# Altium PCB MainPCB.PcbDoc
Units mil, origin at the board's own origin, x right, y up, seen from the top; angles counter-clockwise.
Board outline 2325 x 1355 mil, 2 copper layers (Top Layer, Bottom Layer); 50 components, 30 nets, 230 pads, 0 vias.
Unrouted connection lines stored in the file: 125.
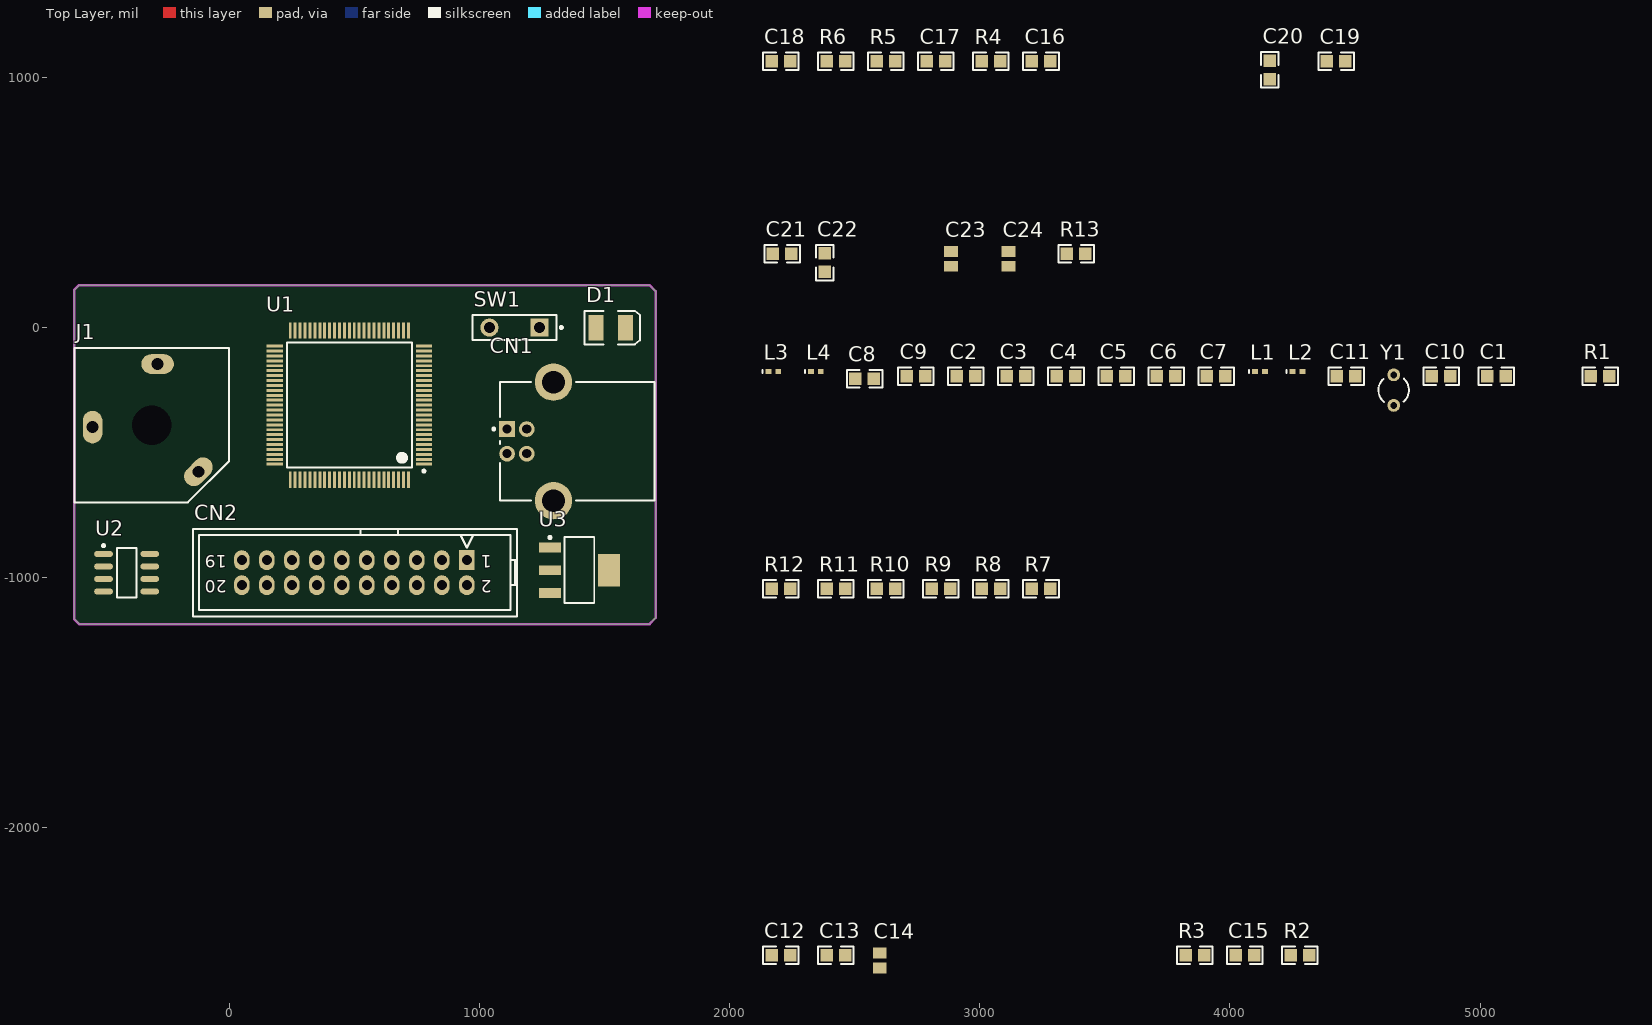
[diagram p0: Top Layer view]
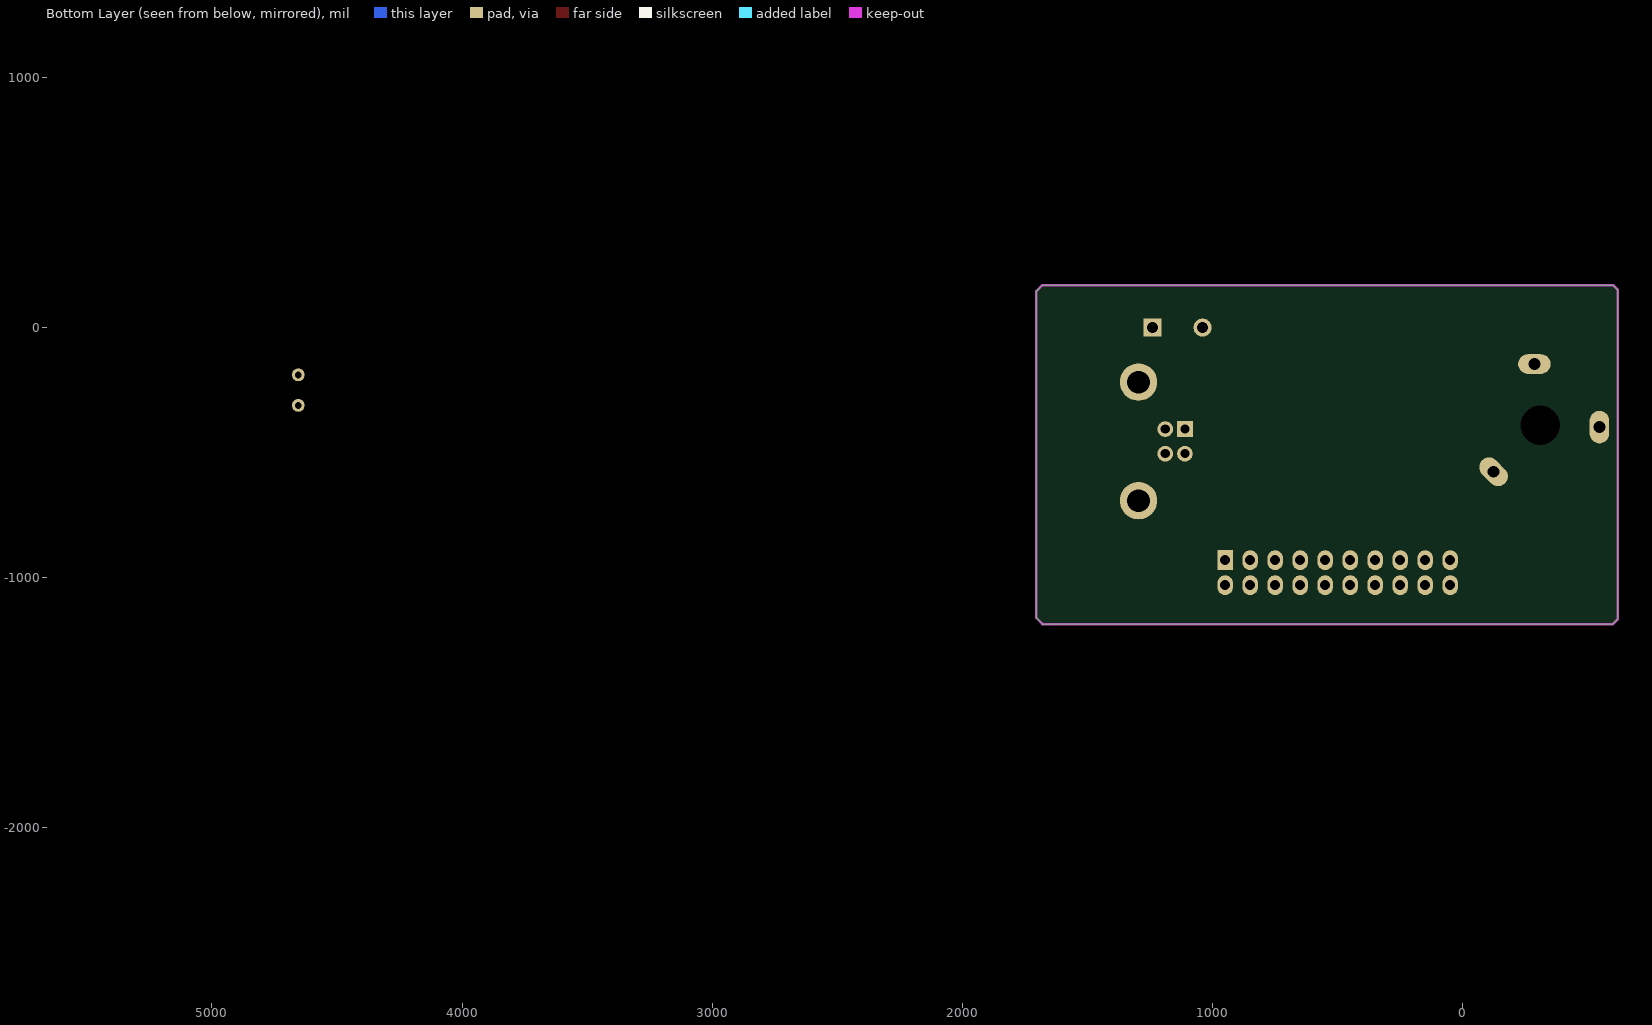
[diagram p1: Bottom Layer view, seen from below]

## Layer stack, top to bottom
Top Layer: signal copper 1.4
Dielectric: dielectric 12.6, FR-4, Dk 4.8
Bottom Layer: signal copper 1.4

## Board outline
-620,-1165 -600,-1185 1680,-1185 1705,-1160 1705,145 1680,170 -600,170 -620,150

## Design rules (kind name [scope] priority, off if disabled: settings)
Clearance [All] p1: gap=10
PolygonConnect [All] p1: connectstyle=Relief reliefconductorwidth=10 reliefentries=4 polygonreliefangle="90 Angle"
RoomDefinition U_AMP [InComponentClass('U_AMP')] p1: confinementstyle=ConfineIn formatcopy=TRUE lockcomponents=FALSE outline 2120,-3205 4360,-3205 4360,-2365 2120,-2365
RoomDefinition U_JTAG [InComponentClass('U_JTAG')] p2: confinementstyle=ConfineIn formatcopy=TRUE lockcomponents=FALSE outline 2120,-2315 3750,-2315 3750,-900 2120,-900
RoomDefinition U_MCU [InComponentClass('U_MCU')] p3: confinementstyle=ConfineIn formatcopy=TRUE lockcomponents=FALSE outline 2120,-850 6295,-850 6295,-50 2120,-50
RoomDefinition U_POWER [InComponentClass('U_POWER')] p4: confinementstyle=ConfineIn formatcopy=TRUE lockcomponents=FALSE outline 2125,39.53 3885,39.53 3885,439.53 2125,439.53
RoomDefinition U_USB [InComponentClass('U_USB')] p5: confinementstyle=ConfineIn formatcopy=TRUE lockcomponents=FALSE outline 2120,450 4525,450 4525,1210 2120,1210
RoutingVias [All] p1: holewidth=28 width=50 viastyle="Through Hole" minholewidth=28 minwidth=50 maxholewidth=28 maxwidth=50
SilkscreenOverComponentPads [All] p1: minsilkscreentomaskgap=10
SolderMaskExpansion [All] p1: expansion=4
Width [All] p1: maxlimit=10 minlimit=10 preferedwidth=10
27 further rules are at their usual default settings.

## Classes and differential pairs
component class U_AMP: C12 C13 C14 C15 J1 R2 R3 U2
component class U_JTAG: CN2 R7 R8 R9 R10 R11 R12
component class U_MCU: C1 C2 C3 C4 C5 C6 C7 C8 C9 C10 C11 L1 L2 L3 L4 R1 SW1 U1 Y1
component class U_POWER: C21 C22 C23 C24 D1 R13 U3
component class U_USB: C16 C17 C18 C19 C20 CN1 R4 R5 R6

## Components (designator, comment, footprint, x,y, rotation, side; value= is the part's Value field where it differs from the comment)
C1 "100nF" 0805 5065,-195 r0 top
C2 "100nF" 0805 2945,-195 r0 top
C3 "100nF" 0805 3145,-195 r0 top
C4 "100nF" 0805 3345,-195 r0 top
C5 "100nF" 0805 3545,-195 r0 top
C6 "100nF" 0805 3745,-195 r0 top
C7 "100nF" 0805 3945,-195 r0 top
C8 "100nF" 0805 2540,-205 r0 top
C9 "100nF" 0805 2745,-195 r0 top
C10 "22pF" 0805 4845,-195 r0 top
C11 "22pF" 0805 4465,-195 r0 top
C12 "100nF" 0805 2205,-2510 r0 top
C13 "100nF" 0805 2425,-2510 r0 top
C14 "220uF" C0805 2600,-2530 r90 top
C15 "100nF" 0805 4060,-2510 r0 top
C16 "100nF" 0805 3245,1065 r0 top
C17 "20pF" 0805 2825,1065 r0 top
C18 "20pF" 0805 2205,1065 r0 top
C19 "100nF" 0805 4425,1065 r0 top
C20 "220uF" 0805 4160,1030 r90 top
C21 "100nF" 0805 2210,294.53 r0 top
C22 "100nF" 0805 2380,259.53 r90 top
C23 "22uF" C0805 2885,274.53 r90 top
C24 "22uF" C0805 3115,274.53 r90 top
CN1 "USB-B" CONN_USB 1150,-455 r0 top
CN2 "JTAG" FKV20SN 950,-930 r180 top
D1 "Power" 3.5X2.8X1.9 1525,0 r0 top
J1 "Phonejack3" JACK/6-V3 -310,-390 r180 top
L1 "10uH" 0402-A 4120,-175 r0 top
L2 "10uH" 0402-A 4270,-175 r0 top
L3 "10uH" 0402-A 2175,-175 r0 top
L4 "10uH" 0402-A 2345,-175 r0 top
R1 "10K" 0805 5480,-195 r0 top
R2 "1K" 0805 4280,-2510 r0 top
R3 "10K" 0805 3860,-2510 r0 top
R4 "1M" 0805 3045,1065 r0 top
R5 "22R" 0805 2625,1065 r0 top
R6 "22R" 0805 2425,1065 r0 top
R7 "10K" 0805 3245,-1045 r0 top
R8 "10K" 0805 3045,-1045 r0 top
R9 "10K" 0805 2845,-1045 r0 top
R10 "10K" 0805 2625,-1045 r0 top
R11 "10K" 0805 2425,-1045 r0 top
R12 "10K" 0805 2205,-1045 r0 top
R13 "220R" 0805 3385,294.53 r0 top
SW1 "RESET" SPST-2 1140,0 r180 top
U1 "LPC1768" LQFP_100 480,-310 r180 top
U2 "LM386" M08A_L -410,-980 r0 top
U3 "LT1117-3.3" SOT223_4 1400,-970 r0 top
Y1 "12M" R38 4655,-250 r0 top

## Footprints (in the part's own frame and the unit in brackets; to place one, negate y for a bottom-side part, rotate by r counter-clockwise, add the part's x,y. Pads: shape width x height; smd on the part's side, far side on the other; paste and mask are expansions set on the pad)
3.5X2.8X1.9 [mm] "SM LED; 2 C-Bend Leads; Body 3.5 x 2.8 x 1.9 mm, inc leads (LxWxH typ)"
  rect 1.5x2.6 smd: 1(-1.5,0) 2(1.5,0)
  silkscreen extent -2.65,-1.7 2.95,1.7
0402-A [mm] "Chip Inductor, Body 1.0x0.5mm, IPC High Density"
  rect 0.6x0.5 smd: 1(-0.5,0) 2(0.5,0)
  silkscreen extent -1.1,-0.15 -1.1,0.15, body extent -0.55,-0.3 0.55,0.3, height 0.55
0805 [mil]
  rect 50x50 smd: 1(-37,0) 2(37,0)
  silkscreen extent -71,-35 71,35, body extent -39,-25 40,24, height 31
C0805 [mm] "Chip Capacitor, Body 2.0x1.3mm, IPC High Density"
  rect 1.1x1.4 smd: 1(-0.75,0) 2(0.75,0)
  body extent -1.1,-0.72 1.1,0.72, height 1.4
CONN_USB [mm] "Connector; USB1.1, Type B, Thru-Hole; 4 Position; Right Angle"
  rect 1.6x1.6 hole 0.92: 1(-1,1.25)
  round 1.6 hole 0.92: 2(-1,-1.25) 3(1,-1.25) 4(1,1.25)
  round 3.8 hole 2.3: 5(3.71,6.02) 6(3.71,-6.02)
  silkscreen extent -2.47,-6.02 13.99,6.02, body extent -3.03,-6 13.97,6, height 11
FKV20SN [mil] "Connector; BoxHeader; 10x2 Position ,2.54mm Pitch"
  rect 62x80 hole 40: 1(0,0)
  oval 62x80 hole 40: 2(0,100) 3(100,0) 4(100,100) 5(200,0) 6(200,100) 7(300,0) 8(300,100) 9(400,0) 10(400,100) 11(500,0) 12(500,100) 13(600,0) 14(600,100) 15(700,0) 16(700,100) 17(800,0) 18(800,100) 19(900,0) 20(900,100)
  silkscreen extent -200,-125 1095,225, body extent -197,-126 1098,244, height 366
JACK/6-V3 [mm] "Connector; Jack Socket, 1/4\" [6.5mm], Thru-Hole, 3 Position, Vertical, Body 15.7 x 15.7 x 31 mm (WxTxH)"
  oval 2x3.3 hole 1.2: 1(6,0.2)
  oval 3.3x2 hole 1.2: 3(-0.6,-6.2)
  oval 2x3.3 hole 1.2 rot 135: 5(-4.738,4.738)
  round 3.7 hole 4: MH1(0,0)
  silkscreen extent -7.85,-7.85 7.85,7.85
LQFP_100 [mm] "LQFP, 100-Leads, Body 16.0x16.0mm (max), Pitch 0.50mm, IPC Medium Density"
  rect 1.65x0.3 smd: 1(-7.575,6) 2(-7.575,5.5) 3(-7.575,5) 4(-7.575,4.5) 5(-7.575,4) 6(-7.575,3.5) 7(-7.575,3) 8(-7.575,2.5) 9(-7.575,2) 10(-7.575,1.5) 11(-7.575,1) 12(-7.575,0.5) 13(-7.575,0) 14(-7.575,-0.5) 15(-7.575,-1) 16(-7.575,-1.5) 17(-7.575,-2) 18(-7.575,-2.5) 19(-7.575,-3) 20(-7.575,-3.5) 21(-7.575,-4) 22(-7.575,-4.5) 23(-7.575,-5) 24(-7.575,-5.5) 25(-7.575,-6) 51(7.575,-6) 52(7.575,-5.5) 53(7.575,-5) 54(7.575,-4.5) 55(7.575,-4) 56(7.575,-3.5) 57(7.575,-3) 58(7.575,-2.5) 59(7.575,-2) 60(7.575,-1.5) 61(7.575,-1) 62(7.575,-0.5) 63(7.575,0) 64(7.575,0.5) 65(7.575,1) 66(7.575,1.5) 67(7.575,2) 68(7.575,2.5) 69(7.575,3) 70(7.575,3.5) 71(7.575,4) 72(7.575,4.5) 73(7.575,5) 74(7.575,5.5) 75(7.575,6)
  rect 0.3x1.65 smd: 26(-6,-7.575) 27(-5.5,-7.575) 28(-5,-7.575) 29(-4.5,-7.575) 30(-4,-7.575) 31(-3.5,-7.575) 32(-3,-7.575) 33(-2.5,-7.575) 34(-2,-7.575) 35(-1.5,-7.575) 36(-1,-7.575) 37(-0.5,-7.575) 38(0,-7.575) 39(0.5,-7.575) 40(1,-7.575) 41(1.5,-7.575) 42(2,-7.575) 43(2.5,-7.575) 44(3,-7.575) 45(3.5,-7.575) 46(4,-7.575) 47(4.5,-7.575) 48(5,-7.575) 49(5.5,-7.575) 50(6,-7.575) 76(6,7.575) 77(5.5,7.575) 78(5,7.575) 79(4.5,7.575) 80(4,7.575) 81(3.5,7.575) 82(3,7.575) 83(2.5,7.575) 84(2,7.575) 85(1.5,7.575) 86(1,7.575) 87(0.5,7.575) 88(0,7.575) 89(-0.5,7.575) 90(-1,7.575) 91(-1.5,7.575) 92(-2,7.575) 93(-2.5,7.575) 94(-3,7.575) 95(-3.5,7.575) 96(-4,7.575) 97(-4.5,7.575) 98(-5,7.575) 99(-5.5,7.575) 100(-6,7.575)
  silkscreen extent -7.7,-6.35 6.35,6.82, body extent -8,-7.97 8,8.03, height 1.6
M08A_L [mm] "SOIC, 8-Leads, Body 4.9x3.9mm, Pitch 1.27mm, IPC High Density"
  oval 1.9x0.6 smd: 1(-2.35,1.905) 2(-2.35,0.635) 3(-2.35,-0.635) 4(-2.35,-1.905) 5(2.35,-1.905) 6(2.35,-0.635) 7(2.35,0.635) 8(2.35,1.905)
  silkscreen extent -2.47,-2.5 1,2.88, body extent -2,-2.5 2,2.5, height 1.75
R38 [mm] "Crystal, Thru-Hole; 2 Leads; Body 3.1 x 8.2 mm (Dia.xH)"
  round 1.3 hole 0.7: 1(0,1.55) 2(0,-1.55)
  silkscreen extent -1.55,-1.19 1.55,1.17
SOT223_4 [mm] "SOT223, 4-Leads, Body 6.7x7.3mm (max), Pitch 2.30mm, IPC Medium Density"
  rect 2.2x1 smd: 1(-3,2.3) 2(-3,0) 3(-3,-2.3)
  rect 2.2x3.3 smd: 4(3,0)
  silkscreen extent -3.12,-3.35 1.5,3.45, body extent -3.45,-3.23 3.55,3.27, height 1.65
SPST-2 [mm] "Switch; 2 Leads"
  rect 1.85x1.85 hole 1.1: 1(-2.54,0)
  round 1.85 hole 1.1: 2(2.54,0)
  silkscreen extent -4.89,-1.27 4.28,1.27

## Part data
C1 C2 C3 C4 C5 C6 C7 C8 C9 C10 C11 C12 C13 C15 C16 C17 C18 C19 C20 C21 C22: library part Cap, "Capacitor"
C14 C23 C24: library part "Cap Pol3", "Polarized Capacitor (Surface Mount)"
D1: library part LED3, "Typical BLUE SiC LED"
J1: "Jack Socket, 1/4\" [6.5mm], Thru-Hole, Vertical, 3-Conductor Open Circuit (Non-Normalling)"
L1 L2 L3 L4: library part Inductor, "Inductor"
R1 R2 R3 R4 R5 R6 R7 R8 R9 R10 R11 R12 R13: library part Res2, "Resistor"
SW1: library part SW-PB, "Switch"
U2: library part LM386MX-1, "Low Voltage Audio Power Amplifier, 8-pin Narrow SOIC"
Y1: library part XTAL, "Crystal Oscillator"

## Nets (pads, with @x,y where several pads share a name; then routed paths per layer and width w, separated by ;. In a path a pad name is that pad's centre, name@x,y a point inside that pad or via, vN(x,y) a via of type N, cw(c..) or ccw(c..) an arc to the next point about the centre after c; other vN are vias at no path point)
3V3: C2.1 C3.1 C4.1 C5.1 C6.1 C7.1 C12.1 C22.1 C24.1 CN2.1 CN2.2 L1.1 R1.1 R7.1 R8.1 R9.1 R11.1 R12.1 R13.1 U1.20 U1.28 U1.42 U1.54 U1.71 U1.84 U1.96 U2.6 U3.2
5V: C19.2 C20.2 C21.1 C23.1 CN1.1 U3.3
GND: C1.2 C2.2 C3.2 C4.2 C5.2 C6.2 C7.2 C10.2 C11.1 C12.2 C13.2 C16.2 C17.1 C18.2 C19.1 C20.1 C21.2 C22.2 C23.2 C24.2 CN1.4 CN2.4 CN2.6 CN2.8 CN2.10 CN2.12 CN2.14 CN2.16 CN2.18 CN2.20 D1.2 J1.5 L3.1 R2.2 R4.1 R10.1 SW1.1 U1.31 U1.41 U1.55 U1.72 U1.83 U1.97 U2.2 U2.4 U3.1
NetC1_1: C1.1 CN2.15 R1.2 SW1.2 U1.17
NetC10_1: C10.1 U1.22 Y1.2
NetC11_2: C11.2 U1.23 Y1.1
NetC13_1: C13.1 U2.7
NetC14_1: C14.1 U2.5
NetC14_2: C14.2 J1.1 J1.3
NetC15_1: C15.1 R3.1
NetC15_2: C15.2 U1.6
NetC16_1: C16.1 CN1.5 CN1.6 R4.2
NetC17_2: C17.2 R5.2 U1.30
NetC18_1: C18.1 R6.2 U1.29
NetCN1_2: CN1.2 R5.1
NetCN1_3: CN1.3 R6.1
NetCN2_3: CN2.3 R7.2 U1.4
NetCN2_5: CN2.5 R8.2 U1.2
NetCN2_7: CN2.7 R9.2 U1.3
NetCN2_9: CN2.9 R10.2 U1.5
NetCN2_11: CN2.11 R11.2 U1.100
NetCN2_13: CN2.13 R12.2 U1.1
NetD1_1: D1.1 R13.2
NetR2_1: R2.1 R3.2 U2.3
NetU1_32: U1.32
NetU1_64: U1.64
VDDA: C8.1 L1.2 L2.1 U1.10
VREF+: C9.1 L2.2 U1.12
VREF-: C9.2 L4.2 U1.15
VSSA: C8.2 L3.2 L4.1 U1.11
pads on no net: CN2.17 CN2.19 J1.MH1 U1.7 U1.8 U1.9 U1.13 U1.14 U1.16 U1.18 U1.19 U1.21 U1.24 U1.25 U1.26 U1.27 U1.33 U1.34 U1.35 U1.36 U1.37 U1.38 U1.39 U1.40 U1.43 U1.44 U1.45 U1.46 U1.47 U1.48 U1.49 U1.50 U1.51 U1.52 U1.53 U1.56 U1.57 U1.58 U1.59 U1.60 U1.61 U1.62 U1.63 U1.65 U1.66 U1.67 U1.68 U1.69 U1.70 U1.73 U1.74 U1.75 U1.76 U1.77 U1.78 U1.79 U1.80 U1.81 U1.82 U1.85 U1.86 U1.87 U1.88 U1.89 U1.90 U1.91 U1.92 U1.93 U1.94 U1.95 U1.98 U1.99 U2.1 U2.8 U3.4

## Keep-outs
Keep-Out Layer:
  lines w10: -620,-1165 -600,-1185 1680,-1185 1705,-1160 1705,145 1680,170 175,170 -600,170 -620,150 -620,-1165

## Text inside footprints (layer, text, board x,y; h text height)
CN2: Top Overlay "20" at -10,-1010 h50 r180; Top Overlay "19" at -10,-910 h50 r180; Top Overlay "1" at 1050,-910 h50 r180; Top Overlay "2" at 1050,-1010 h50 r180